# Altium PCB PCB1.PcbDoc
Units mil, origin at the board's own origin, x right, y up, seen from the top; angles counter-clockwise.
Board outline 6000 x 4000 mil, 2 copper layers (Top Layer, Bottom Layer); 81 components, 79 nets, 280 pads, 19 vias.
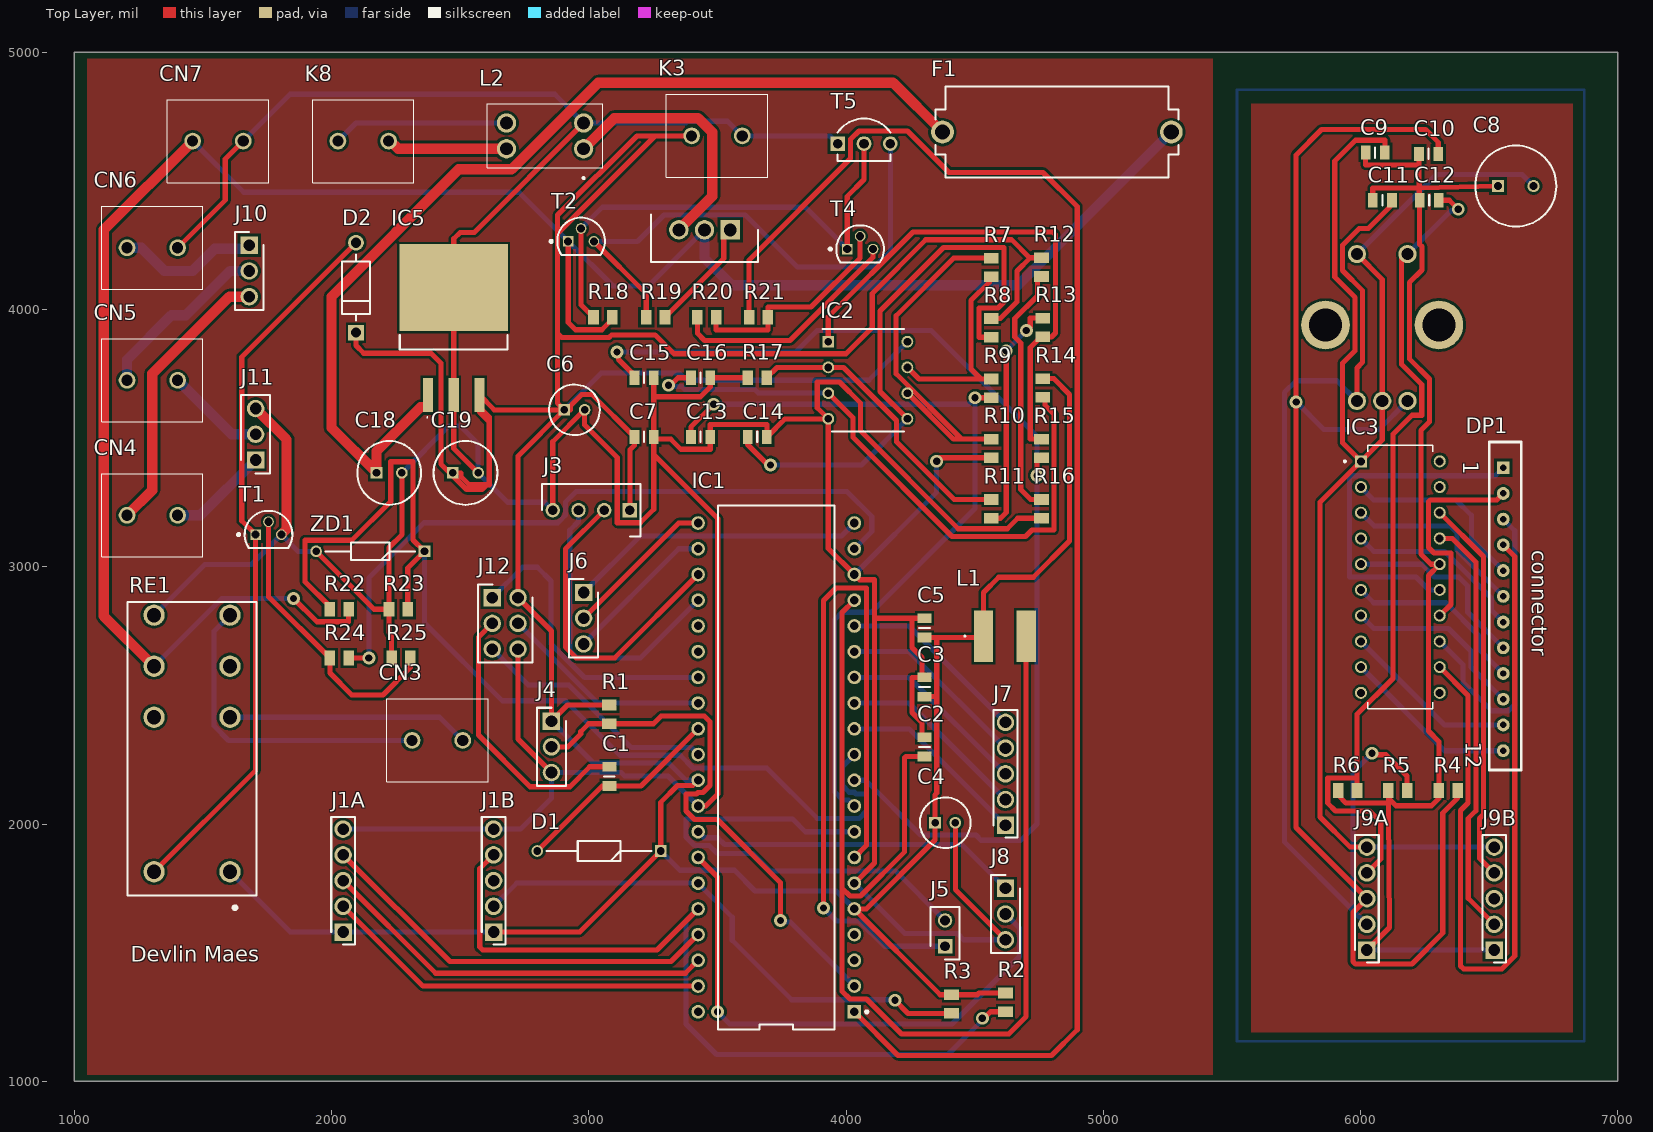
[diagram p0: Top Layer view]
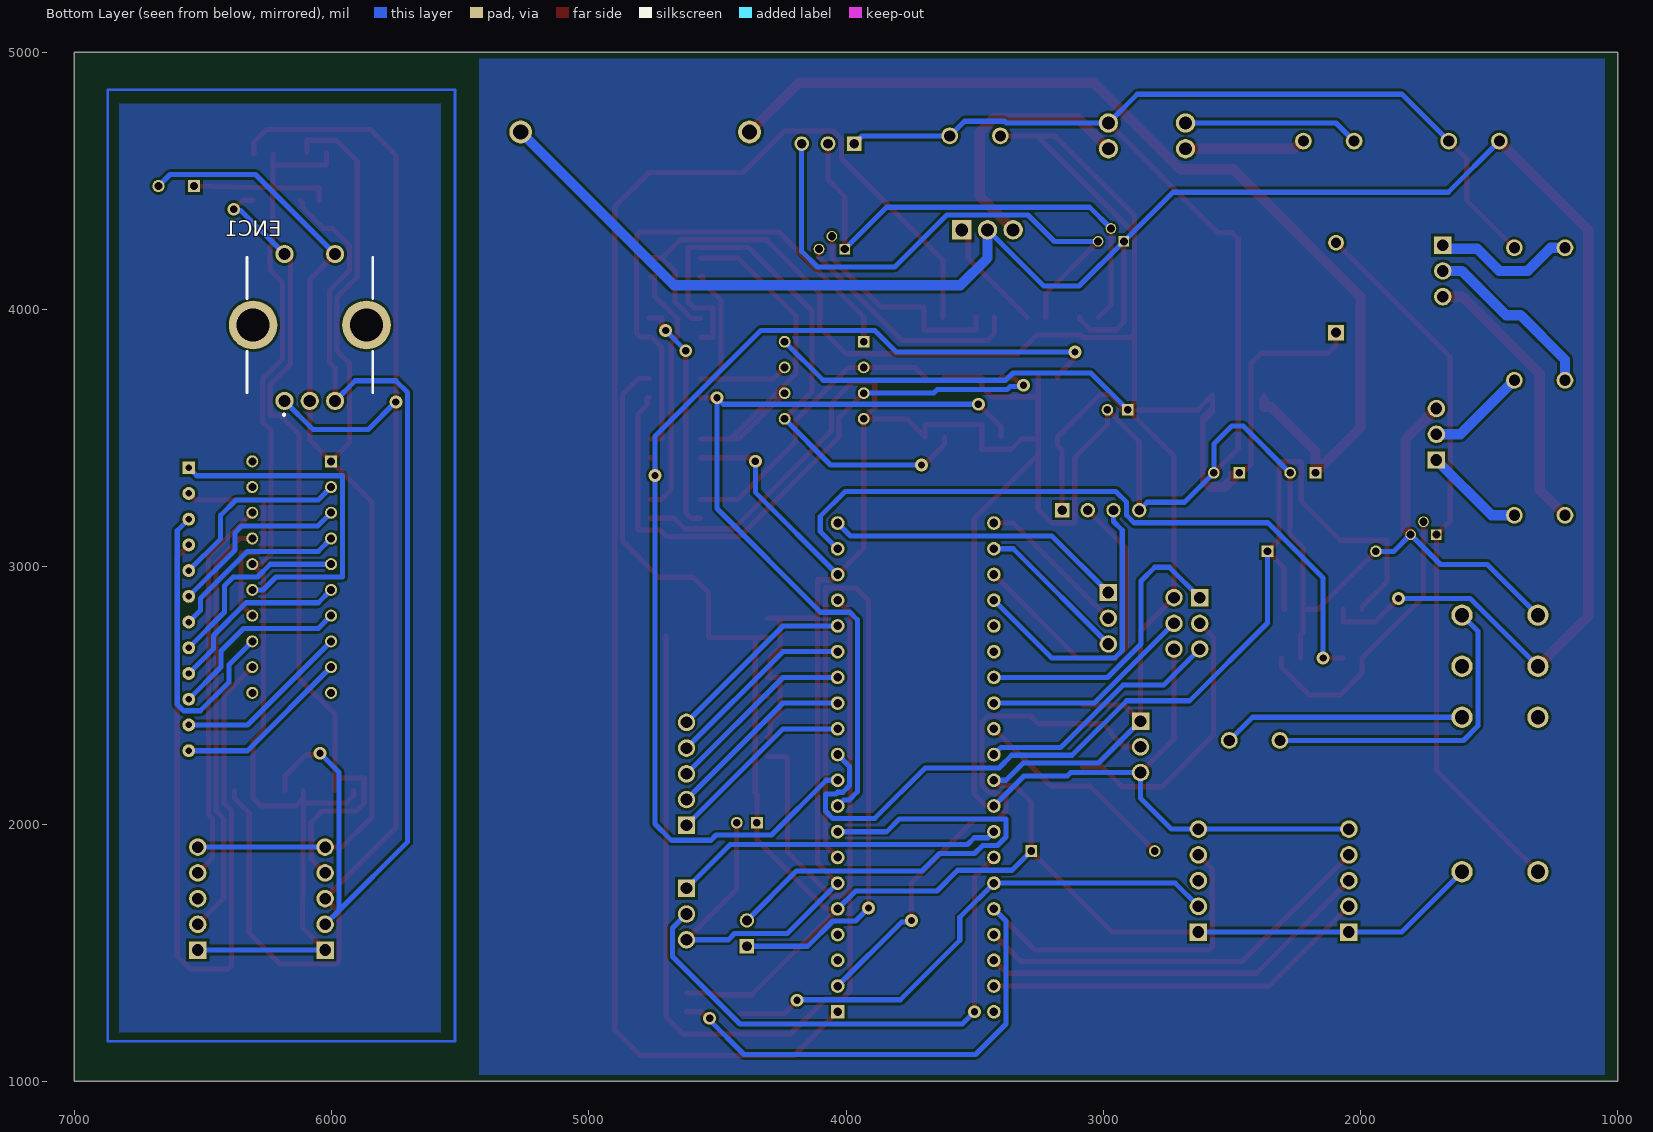
[diagram p1: Bottom Layer view, seen from below]
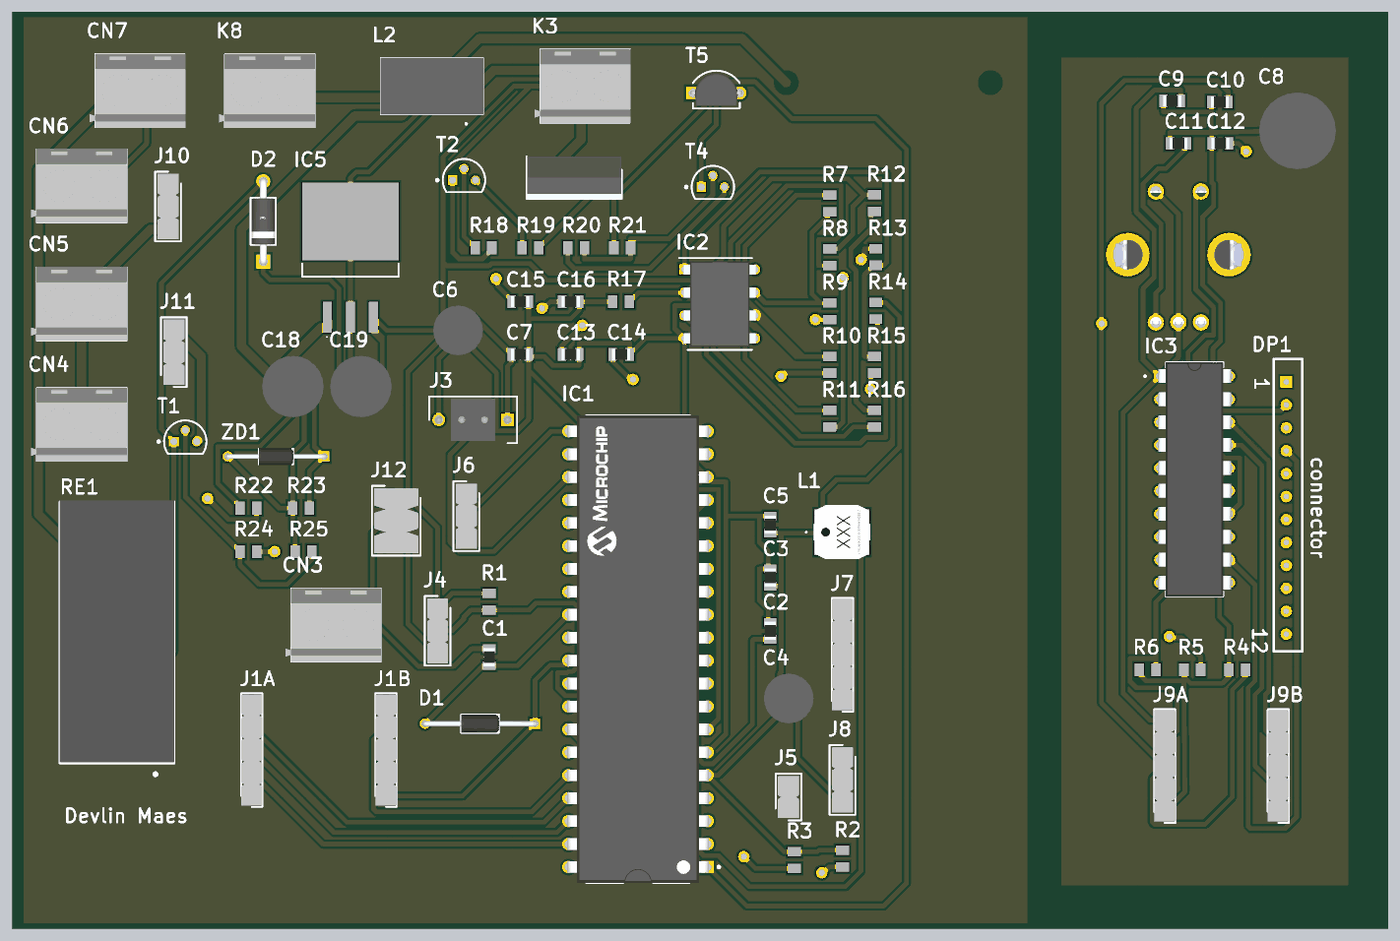
[diagram p2: 3D render of the assembled board from above, using the file's embedded part models]

## Layer stack, top to bottom
Top Solder: solder mask 0.4, Solder Resist, Dk 3.5
Top Layer: signal copper 1.4
Dielectric 1: dielectric 12.6, FR-4, Dk 4.8
Bottom Layer: signal copper 1.4
Bottom Solder: solder mask 0.4, Solder Resist, Dk 3.5

## Board outline
1000,1000 7000,1000 7000,5000 1000,5000
board region "Default Layer Stack Region": 5475,5000 7000,5000 7000,1000 5475,1000
board region "Default Layer Stack Region": 5475,1000 1000,1000 1000,5000 5475,5000

## Design rules (kind name [scope] priority, off if disabled: settings)
Clearance [All] p1: gap=10 ignorepadtopadclearanceinfootprint=FALSE
Height [All] p1: minheight=0 maxheight=2000 prefheight=500
PolygonConnect [All] p1: connectstyle=Relief reliefconductorwidth=10 reliefentries=4 polygonreliefangle="90 Angle" airgapwidth=10
RoutingVias [All] p1: holewidth=28 width=50 viastyle="Through Hole" minholewidth=28 minwidth=50 maxholewidth=28 maxwidth=50
SolderMaskExpansion [All] p1: expansion=4 istentingtop=FALSE
Width [All] p1: maxlimit=50 minlimit=20 preferedwidth=20 minimp=50.000000 maximp=50.000000 favimp=50.000000
29 further rules are at their usual default settings.

## Classes and differential pairs
component class Voeding: C18 C19 CN3 CN4 CN5 CN6 CN7 D2 F1 IC5 J10 J11 K1 K2 R22 R23 R24 R25 RE1 T1 ZD1
component class Versterker: C6 C7 C13 C14 C15 C16 IC2 K3 R7 R8 R9 R10 R11 R12 R13 R14 R15 R16 R17
component class Regelaar: K8 L2 R18 R19 R20 R21 T2 T4 T5
component class display: C8 C9 C10 C11 C12 DP1 ENC1 IC3 J9A J9B R4 R5 R6
component class CPU: C1 C2 C3 C4 C5 D1 IC1 J1A J1B J3 J4 J5 J6 J7 J8 J12 L1 R1 R2 R3

## Components (designator, comment, footprint, x,y, rotation, side; value= is the part's Value field where it differs from the comment)
C1 "10 nF" 0805 3080,2185 r90 top
C2 "10 nF" 0805 4305,2300 r90 top
C3 "100n" 0805 4305,2532.4 r90 top
C4 "10µ 50V" "Elco 10uF 50V" 4346.26,2005 r0 top
C5 "100 n" 0805 4305,2762.6 r90 top
C6 "10µF 50V" "Elco 10uF 50V" 2905,3610 r0 top
C7 "10 nF" 0805 3215,3505 r0 top
C8 "100µ 50V" "Elco 100uF 50V" 6535,4480 r0 top
C9 "100 nF" 0805 6057.4,4610 r0 top
C10 "10 nF" 0805 6265,4605 r0 top
C11 "10 nF" 0805 6085,4425 r0 top
C12 "10 nF" 0805 6267.4,4425 r0 top
C13 "10 nF" 0805 3435,3505 r0 top
C14 "10 nF" 0805 3655,3505 r0 top
C15 "10 nF" 0805 3215,3735 r0 top
C16 "10 nF" 0805 3435,3735 r0 top
C18 "100µF 25V" "Elco 100uF 25V" 2175,3365 r0 top
C19 "100µF 25V" "Elco 100uF 25V" 2471.57,3365 r0 top
CN3 "282836-2" "Schroefconnector 2 Pin - duplicate" 2510,2325 r0 top
CN4 "lader" "Schroefconnector 2 Pin - duplicate" 1401.85,3200 r0 top
CN5 "Batterij 20V 2Ah-4Ah" "Schroefconnector 2 Pin - duplicate" 1401.85,3725 r0 top
CN6 "282836-2" "Schroefconnector 2 Pin - duplicate" 1401.85,4240 r0 top
CN7 "282836-2" "Schroefconnector 2 Pin - duplicate" 1656.85,4655 r0 top
D1 "1N4148-B" 1N4148 3280,1895 r180 top
D2 "1N4007 diode" 1N4007(diode) 2095,4085 r90 top value=15pF
DP1 "7segment" DIP12(7segment) 6620,2975 r270 top
ENC1 "PEC11R-4225F-S0024" Encoder 6084.53,3940 r180 bottom
F1 "" FuseHolder -45180.12,-45310 r180 top
IC1 "ATMEGA4809-PF" "ATMEGA4809-PF(integraded circuit)" 3728.75,2220 r180 top
IC2 "MCP6002-I/P" Opamp 4085,3725 r0 top
IC3 "TM1637" TM1637 6155,2960 r0 top
IC5 "TL780-05CKTTR" "DC-DC Convertor" 2475,3933.23 r0 top
J1A "5-146280-5" "5 Pin Header" 2045,1580 r90 top
J1B "5-146280-5" "5 Pin Header" 2630,1580 r90 top
J3 "5-146280-4" "4 Pin Header" 3160,3220 r90 top
J4 "5-146280-3" "3 Pin Header" 2855,2400 r270 top
J5 "5-146280-2" "2 Pin Header" 4385,1525 r90 top
J6 "5-146280-3" "3 Pin Header" 2980,2900 r270 top
J7 "5-146280-5" "5 Pin Header" 4620,1995 r90 top
J8 "5-146280-3" "3 Pin Header" 4620,1750 r270 top
J9A "5-146280-5" "5 Pin Header" 6025,1510 r90 top
J9B "5-146280-5" "5 Pin Header" 6520,1510 r90 top
J10 "5-146280-3" "3 Pin Header" 1680,4250 r270 top
J11 "5-146280-3" "3 Pin Header" 1705,3415 r90 top
J12 "2x3 Pin Header" "2x3 Pin Header" 2625,2880 r270 top
K3 "282836-2" "Schroefconnector 2 Pin - duplicate" 3596.85,4675 r0 top
K8 "282836-2" "Schroefconnector 2 Pin - duplicate" 2221.85,4655 r0 top
L1 "10uH" Smoorspoel 4617.68,2730 r0 top
L2 "Smoorspoel commom mode" "Common mode smoorspoel" 2980,4625 r90 top
R1 "4k7" weerstand 3080,2426.42 r90 top
R2 "4k7" weerstand 4620,1306.42 r90 top
R3 "4k7" weerstand 4410,1300 r90 top
R4 "10k" weerstand 6341.42,2130 r180 top
R5 "10k" weerstand 6145,2130 r180 top
R6 "10k" weerstand 5950,2130 r180 top
R7 "18k" weerstand 4565,4163.58 r90 top
R8 "5k6" weerstand 4565,3928.58 r90 top
R9 "5k6" weerstand 4565,3693.58 r90 top
R10 "100E" weerstand 4565,3460 r90 top
R11 "18k" weerstand 4565,3225 r90 top
R12 "1M" weerstand 4760,4165 r90 top
R13 "18k" weerstand 4765,3930 r90 top
R14 "5k6" weerstand 4765,3695 r90 top
R15 "5k6" weerstand 4760,3460 r90 top
R16 "10M" weerstand 4760,3225 r90 top
R17 "100E" weerstand 3655,3735 r0 top
R18 "4k7" weerstand 3055,3970 r0 top
R19 "100E" weerstand 3260,3970 r0 top
R20 "4k7" weerstand 3458.58,3970 r0 top
R21 "10k" weerstand 3660,3970 r0 top
R22 "6.8k" weerstand 2030,2835 r0 top
R23 "10k" weerstand 2260,2835 r0 top
R24 "10k" weerstand 2030,2645 r0 top
R25 "4.7k" weerstand 2270,2645 r0 top
RE1 "RT424005" "Relay RT424005" 1457.64,1814.21 r90 top
T1 "BC547C" "BC547C (transistor)" 1755,3125 r0 top
T2 "BC547C" "BC547C (transistor)" 2970,4265 r0 top
T3 "IRF9Z34NPBF" MOSFET 3550,4310 r180 top
T4 "BC547C" "BC547C (transistor)" 4055,4235 r0 top
T5 "BC557BTF" "transistor BC557" 4070,4660 r90 top
ZD1 "5V1" "Zener diode" 2361.26,3060 r180 top

## Footprints (in the part's own frame and the unit in brackets; to place one, negate y for a bottom-side part, rotate by r counter-clockwise, add the part's x,y. Pads: shape width x height; smd on the part's side, far side on the other; paste and mask are expansions set on the pad)
1N4007(diode) [mm]
  rect 1.55x1.55 hole 1 paste-2539.97 mask+0: 1(-4.44,0)
  round 1.55 hole 1 paste-2539.97 mask+0: 2(4.44,0)
  silkscreen extent -3.27,-1.4 3.27,1.4, body extent -5.32,-1.5 5.32,1.5, height 0.25
1N4148 [mm] "DIOAD1220W56L420D200"
  rect 1.15x1.15 hole 0.75: 1(0,0)
  round 1.15 hole 0.75: 2(12.2,0)
  silkscreen extent 0.92,-1 11.27,1, body extent -0.28,-1 12.48,1, height 1.99
"2 Pin Header" [mm]
  rect 1.425x1.425 hole 0.95: 1(0,0)
  round 1.425 hole 0.95: 2(2.54,0)
  silkscreen extent -1.32,-1.42 3.86,1.42, body extent -1.07,-1.17 3.61,1.17, height 8.12
"2x3 Pin Header" [mm] "HDRV6W67P254_2X3_721X488X872P"
  rect 1.725x1.725 hole 1.15: 1(0,0)
  round 1.725 hole 1.15: 2(0,2.54) 3(2.54,0) 4(2.54,2.54) 5(5.08,0) 6(5.08,2.54)
  silkscreen extent -1.32,-1.42 6.4,3.96, body extent -1.07,-1.17 6.15,3.71, height 8.12
"3 Pin Header" [mm]
  rect 1.725x1.725 hole 1.15: 1(0,0)
  round 1.725 hole 1.15: 2(2.54,0) 3(5.08,0)
  silkscreen extent -1.32,-1.42 6.4,1.42, body extent -1.07,-1.17 6.15,1.17, height 8.12
"4 Pin Header" [mm]
  rect 1.425x1.425 hole 0.95: 1(0,0)
  round 1.425 hole 0.95: 2(0,2.54) 3(0,5.08) 4(0,7.62)
  silkscreen extent -2.59,-1.06 2.59,8.68, body extent -2.33,-0.38 2.33,8, height 8.21
"5 Pin Header" [mm]
  rect 1.725x1.725 hole 1.15: 1(0,0)
  round 1.725 hole 1.15: 2(2.54,0) 3(5.08,0) 4(7.62,0) 5(10.16,0)
  silkscreen extent -1.21,-1.17 11.37,1.17, body extent -1.07,-1.17 11.23,1.17, height 8.12
0805 [mm]
  rect 0.95x1.4 smd: 1(-0.95,0) 2(0.95,0)
  silkscreen extent 0,-0.53 0,0.53, body extent -1,-0.63 1,0.63, height 0.6
"ATMEGA4809-PF(integraded circuit)" [mm]
  rect 1.35x1.35 hole 0.85 paste-2539.97 mask+0: 1(-7.715,24.13)
  round 1.35 hole 0.85 paste-2539.97 mask+0: 2(-7.715,21.59) 3(-7.715,19.05) 4(-7.715,16.51) 5(-7.715,13.97) 6(-7.715,11.43) 7(-7.715,8.89) 8(-7.715,6.35) 9(-7.715,3.81) 10(-7.715,1.27) 11(-7.715,-1.27) 12(-7.715,-3.81) 13(-7.715,-6.35) 14(-7.715,-8.89) 15(-7.715,-11.43) 16(-7.715,-13.97) 17(-7.715,-16.51) 18(-7.715,-19.05) 19(-7.715,-21.59) 20(-7.715,-24.13) 21(7.715,-24.13) 22(7.715,-21.59) 23(7.715,-19.05) 24(7.715,-16.51) 25(7.715,-13.97) 26(7.715,-11.43) 27(7.715,-8.89) 28(7.715,-6.35) 29(7.715,-3.81) 30(7.715,-1.27) 31(7.715,1.27) 32(7.715,3.81) 33(7.715,6.35) 34(7.715,8.89) 35(7.715,11.43) 36(7.715,13.97) 37(7.715,16.51) 38(7.715,19.05) 39(7.715,21.59) 40(7.715,24.13)
  silkscreen extent -9.07,-25.88 5.76,25.88, body extent -8.49,-26.71 8.49,26.71, height 0.25
"BC547C (transistor)" [mm] "TO, 3-Leads, Body Dia 4.7mm, Pitch 1.27mm"
  rect 1.05x1.05 hole 0.8: 1(-1.27,0)
  round 1.05 hole 0.8: 2(0,1.27) 3(1.27,0)
  silkscreen extent -3.07,-1.34 2.35,2.35, body extent -2.35,-1.33 2.36,2.36, height 7.87
"Common mode smoorspoel" [mil] "CM2545X171B10"
  round 75 hole 50: 1(0,0) 2(100,0) 3(100,300) 4(0,300)
  silkscreen extent -118,-74 174,374, body extent -74,-74 174,374, height 378
"DC-DC Convertor" [mm]
  rect 1x3.4 smd: 1(-2.54,-6.745) 2(0,-6.745) 3(2.54,-6.745)
  rect 10.7x8.6 smd: 4(0,3.855)
  silkscreen extent -5.33,-9 5.33,-0.8
DIP12(7segment) [mil]
  rect 50x50 hole 25: 1(-410,-65)
  round 50 hole 25: 2(-310,-65) 3(-210,-65) 4(-110,-65) 5(-10,-65) 6(90,-65) 7(190,-65) 8(290,-65) 9(390,-65) 10(490,-65) 11(590,-65) 12(690,-65)
  silkscreen extent -510,-120 765,5
"Elco 10uF 50V" [mm] "CAPPRD200W55D500H1250"
  rect 1.15x1.15 hole 0.75: 1(0,0)
  round 1.15 hole 0.75: 2(2,0)
  silkscreen extent -1.5,-2.5 3.5,2.5, body extent -1.75,-2.75 3.75,2.75, height 12.5
"Elco 100uF 25V" [mm]
  rect 1.15x1.15 hole 0.75: 1(0,0)
  round 1.15 hole 0.75: 2(2.5,0)
  silkscreen extent -1.9,-3.15 4.4,3.15, body extent -2.15,-3.4 4.65,3.4, height 12.7
"Elco 100uF 50V" [mm]
  rect 1.2x1.2 hole 0.8: 1(0,0)
  round 1.2 hole 0.8: 2(3.5,0)
  silkscreen extent -2.25,-4 5.75,4, body extent -2.5,-4.25 6,4.25, height 12.5
Encoder [mm]
  round 1.8 hole 1.2: 1(-2.5,-7.5) 2(2.5,-7.5) 3(0,-7.5) 4(-2.5,7) 5(2.5,7)
  round 4.8 hole 3.28: 6(5.6,0) 7(-5.6,0)
  silkscreen extent -6.2,-8.95 6.2,6.7, body extent -7,-7.75 6.99,7.15, height 31.51
FuseHolder [mm] "FUSEHOLDER BLOCKS - PCB - CLIP COVER - THT"
  round 2.25 hole 1.5: 1(-1281.3,-1270) 2(-1258.7,-1270)
  silkscreen extent -1282,-1274.5 -1258,-1265.5, body extent -1282,-1274.5 -1258,-1265.5, height 13.55
MOSFET [mm]
  rect 1.92x1.92 hole 1.28: 1(0,0)
  round 1.92 hole 1.28: 2(2.54,0) 3(5.08,0)
  silkscreen extent -2.73,-1.49 7.81,3.2, body extent -2.67,-1.5 7.75,3.19, height 18.84
Opamp [mm]
  rect 1.159x1.159 hole 0.759: 1(-3.905,3.81)
  round 1.159 hole 0.759: 2(-3.905,1.27) 3(-3.905,-1.27) 4(-3.905,-3.81) 5(3.905,-3.81) 6(3.905,-1.27) 7(3.905,1.27) 8(3.905,3.81)
  silkscreen extent -4.48,-5.08 3.56,5.08, body extent -4.05,-4.75 4.05,4.75, height 5.33
"Relay RT424005" [mm]
  round 2.1 hole 1.4: 11(20.3,3.75) 12(20.3,-3.75) 14(15.26,-3.75) 21(25.34,3.75) 22(15.26,3.75) 24(25.34,-3.75) A1(0,-3.75) A2(0,3.75)
  silkscreen extent -3.67,-6.35 26.65,6.35, body extent -2.21,-6.35 26.79,6.35, height 15.86
"Schroefconnector 2 Pin - duplicate" [mm]
  round 1.65 hole 1.1: 1(0,0) 2(-5,0)
  silkscreen extent -7.5,-4.1 2.5,4.1, body extent -8.09,-4.1 2.51,4.1, height 10.02
Smoorspoel [mm] "10uH"
  rect 1.9x5.1 smd: 1(-2.1,0) 2(2.1,0)
  silkscreen extent -4,-0.05 -3.9,0.05, body extent -3.15,-3 3.15,3, height 4.5
TM1637 [mm]
  rect 1.19x1.19 hole 0.79: 1(-3.89,11.43)
  round 1.19 hole 0.79: 2(-3.89,8.89) 3(-3.89,6.35) 4(-3.89,3.81) 5(-3.89,1.27) 6(-3.89,-1.27) 7(-3.89,-3.81) 8(-3.89,-6.35) 9(-3.89,-8.89) 10(-3.89,-11.43) 11(3.89,-11.43) 12(3.89,-8.89) 13(3.89,-6.35) 14(3.89,-3.81) 15(3.89,-1.27) 16(3.89,1.27) 17(3.89,3.81) 18(3.89,6.35) 19(3.89,8.89) 20(3.89,11.43)
  silkscreen extent -5.58,-13 3.2,13, body extent -4.03,-13 4.03,13, height 4.31
"transistor BC557" [mm]
  rect 1.45x1.45 hole 0.95 paste-2539.97 mask+0: 1(-0.38,2.6)
  round 1.45 hole 0.95 paste-2539.97 mask+0: 2(-0.38,0) 3(-0.38,-2.6)
  silkscreen extent -2.09,-2.6 2.09,2.6, body extent -2.19,-3.42 2.19,3.42, height 0.25
weerstand [mm] "Chip Resistor, 2-Leads, Body 2.00x1.25mm, IPC Medium Density"
  rect 1.05x1.45 smd: 1(-0.925,0) 2(0.925,0)
  body extent -1.1,-0.72 1.1,0.72, height 0.5
"Zener diode" [mm] "DIOAD1068W53L380D172"
  rect 1.15x1.15 hole 0.75: 1(0,0)
  round 1.15 hole 0.75: 2(10.7,0)
  silkscreen extent 0.93,-0.86 9.77,0.86, body extent -0.26,-0.95 10.95,0.95, height 1.9

## Part data
C1 C2 C3 C5 C7 C9 C10 C11 C12 C13 C14 C15 C16: library part "Condensator 0805", "Chip Multilayer Ceramic Capacitors for General Purpose, 0805, 10uF, X5R, 15%, 10%, 25V", Capacitance=10uF, Case Code (Imperial)=0805, Case Code (Metric)=2012, Dielectric=X5R, Max Operating Temperature=85°C, Min Operating Temperature=-55°C, Package Quantity=1, Tolerance=10%, Voltage=25V, Case/Package=0805, Depth=1.25mm, Height=1.25mm, Lead Free="Lead Free", Length=2mm, Material=Ceramic, Mount="Surface Mount", Packaging="Tape and Reel", Radiation Hardening=No, Termination=SMD/SMT, Thickness=0.053inch, Voltage Rating=25V, Voltage Rating (DC)=25V, Width=0.049inch
C4 C6 C18 C19: library part "Condensator Elco", Manufacturer="AVX Interconnect / Elco", Part Number=02015A270JAT2A
C8: library part "Condensator Elco", "100µ / 50V", Manufacturer="AVX Interconnect / Elco", Part Number=02015A270JAT2A
CN3 CN6 CN7: library part "Schroefconnector 2 Pin L", "Connector", Manufacturer_Name="TE Connectivity", Datasheet Link=https://www.te.com/commerce/DocumentDelivery/DDEController?Action=showdoc&DocId=Customer+Drawing%7F282836%7FJ%7Fpdf%7FEnglish%7FENG_CD_282836_J.pdf%7F282836-2, Height=10mm, Manufacturer_Part_Number=282836-2
CN4 CN5: library part "Schroefconnector 2 Pin L", "Connector", Manufacturer_Name="TE Connectivity", Manufacturer_Part_Number=282836-2, Datasheet Link=https://www.te.com/commerce/DocumentDelivery/DDEController?Action=showdoc&DocId=Customer+Drawing%7F282836%7FJ%7Fpdf%7FEnglish%7FENG_CD_282836_J.pdf%7F282836-2, Height=10mm
D1: "Diode", Manufacturer_Name=Rectron, Manufacturer_Part_Number=1N4148-B
D2: "Rectifier diode 1000 V 1 A DO-41, ,", Capacitance=15pF, Forward Current=1A, Manufacturer=Diotec, Manufacturer Part Number=1N4007, Max Junction Temp=+175°C, Max Repetitive Reverse Voltage=1000V, Max Surge Forward Current=27A, Peak Reverse Current=5uA, Temperature="-50°C to +175°C", Temperature Range Low=-50°C, Automotive=No, Category=Diode, ComponentLink2Description=Datasheet, ComponentLink2URL=https://datasheet.octopart.com/1N4007-Diotec-datasheet-62346875.pdf, Device Class L1="Discrete Semiconductors", Device Class L2=Diodes, Device Class L3="Rectifier Diodes", Height=2.8mm, Ipc Land Pattern Name=DIOAD888W100L520D280, Lead Free=Yes, Octopart=https://octopart.com/1n4007-diotec-4040411, Package=1N4007, Reverse Voltage=1000V, RoHS=TRUE, Temperature Range High=+175°C
ENC1: library part Encoder, "Undefined or Miscellaneous", Manufacturer_Name=Bourns, Mouser2 Part Number=652-PEC11R-4225F-S24, Datasheet Link=https://componentsearchengine.com//PEC11R-4225F-S0024.pdf, Manufacturer_Part_Number=PEC11R-4225F-S0024, Mouser2 Price/Stock=https://www.mouser.com/Search/Refine.aspx?Keyword=652-PEC11R-4225F-S24
F1: library part FuseHolder, Fuse Current=10A, Max Operating Temperature=120°C, Min Operating Temperature=-30°C, Voltage Rating (AC)=250V, Height=13.6mm, Mount="Through Hole", NexarPartId=56808803, Packaging=Box, REACH SVHC=Unknown, RoHS=Non-Compliant
IC1: "Integrated Circuit", Manufacturer_Name=Microchip, Mouser2 Part Number=556-ATMEGA4809-PF, Datasheet Link=https://componentsearchengine.com//ATMEGA4809-PF.pdf, Height=6.35mm, Manufacturer_Part_Number=ATMEGA4809-PF, Mouser2 Price/Stock=https://www.mouser.com/Search/Refine.aspx?Keyword=556-ATMEGA4809-PF
IC2: library part Opamp, "AMP-OPA-MCP6002-IL8", Case/Package=PDIP, Input Bias Current=1pA, Input Offset Voltage (Vos)=4.5mV, Max Frequency=1kHz, Max Input Voltage=6V, Max Operating Temperature=85°C, Min Input Voltage=1.8V, Min Operating Temperature=-40°C, Nominal Supply Current=100uA, Operating Supply Voltage=5.5V, Output Current=23mA, Package Quantity=60, Power Supply Rejection Ratio (PSRR)=86dB, Voltage Gain=112dB, Amplifier Type="GENERAL PURPOSE", Bandwidth=1MHz, Common Mode Rejection Ratio=60dB, Gain Bandwidth Product=1MHz, Height=0.195inch, Input Offset Voltage-Max=4.5mV, Lead Free="Lead Free", Length=0.4inch, Max Supply Voltage=6V, Min Supply Voltage=1.8V, Mount="Through Hole", Number of Amplifiers=2, Number of Channels=2, Number of Circuits=2, Number of Elements=2, Number of Pins=8, Operating Supply Current=100uA, Output Current per Channel=23mA, Packaging=Rail/Tube, Radiation Hardening=No, REACH SVHC="No SVHC", RoHS Compliant=Yes, Slew Rate=0.6V/µs, Slew Rate-Nom=0.6V/µs, Supply Current=100uA, Technology=CMOS, Unity Gain Bandwidth Product=1MHz, Width=0.28inch
IC3: "LED Drive Control Special Circuit", Package=Package, Availability="Not in stock", Check_prices=https://www.snapeda.com/parts/TM1637/Titan+Micro+Electronics/view-part/?ref=eda, MF="Titan Micro Electronics", MP=TM1637, Price=None, SnapEDA_Link=https://www.snapeda.com/parts/TM1637/Titan+Micro+Electronics/view-part/?ref=snap
IC5: library part "DC/DC Convertor", "IC REG LIN 5V 1.5A DDPAK/TO263-3", Case/Package=TO-263, Dropout Voltage=2V, Max Input Voltage=25V, Max Operating Temperature=125°C, Max Output Current=1.5A, Max Output Voltage=5V, Min Input Voltage=7V, Min Operating Temperature=0°C, Output Voltage Accuracy=1%, Package Quantity=1, Power Supply Rejection Ratio (PSRR)=85dB, Quiescent Current=8mA, Accuracy=1%, Height=4.83mm, Lead Free="Lead Free", Length=10.67mm, Mount="Surface Mount", Nominal Output Voltage=5V, Number of Outputs=1, Number of Pins=3, Number of Regulators=1, Output Current=1.5A, Output Type=Fixed, Output Voltage=5V, Packaging="Tape and Reel", Polarity=Positive, REACH SVHC="No SVHC", Weight=0.050897oz, Width=9.65mm
J1A J1B J7 J9A J9B: library part "5 Pin Header", "Connector 5-146280-5", Manufacturer_Name="TE Connectivity", Mouser2 Part Number=571-5-146280-5, Datasheet Link=https://componentsearchengine.com//5-146280-5.pdf, Height=8.21mm, Manufacturer_Part_Number=5-146280-5, Mouser2 Price/Stock=https://www.mouser.com/Search/Refine.aspx?Keyword=571-5-146280-5
J3: library part "4 Pin Header L", "Connector 5-146280-4", Manufacturer_Name="TE Connectivity", Datasheet Link=https://datasheet.datasheetarchive.com/originals/distributors/DKDS-20/396066.pdf, Height=8.21mm, Manufacturer_Part_Number=5-146280-4
J4 J6: library part "3 Pin Header L", "Connector 5-146280-3", Manufacturer_Name="TE Connectivity", Mouser2 Part Number=571-5-146280-3, Datasheet Link=https://componentsearchengine.com//5-146280-3.pdf, Height=8.21mm, Manufacturer_Part_Number=5-146280-3, Mouser2 Price/Stock=https://www.mouser.com/Search/Refine.aspx?Keyword=571-5-146280-3
J5: library part "2 Pin Header L", "Connector", Manufacturer_Name="TE Connectivity", Datasheet Link=http://www.te.com/commerce/DocumentDelivery/DDEController?Action=showdoc&DocId=Customer+Drawing%7F146280%7FH2%7Fpdf%7FEnglish%7FENG_CD_146280_H2.pdf%7F5-146280-2, Height=8.72mm, Manufacturer_Part_Number=5-146280-2
J8 J10 J11: library part "3 Pin Header R", "Connector 5-146280-3", Manufacturer_Name="TE Connectivity", Mouser2 Part Number=571-5-146280-3, Datasheet Link=https://componentsearchengine.com//5-146280-3.pdf, Height=8.21mm, Manufacturer_Part_Number=5-146280-3, Mouser2 Price/Stock=https://www.mouser.com/Search/Refine.aspx?Keyword=571-5-146280-3
J12: "Connector", Manufacturer_Name="TE Connectivity", Manufacturer_Part_Number=5-146256-3, Datasheet Link=https://www.te.com/commerce/DocumentDelivery/DDEController?Action=srchrtrv&DocNm=146256&DocType=Customer+Drawing&DocLang=English, Height=8.72mm
K3 K8: library part "Schroefconnector 2 Pin R", "Connector", Manufacturer_Name="TE Connectivity", Datasheet Link=https://www.te.com/commerce/DocumentDelivery/DDEController?Action=showdoc&DocId=Customer+Drawing%7F282836%7FJ%7Fpdf%7FEnglish%7FENG_CD_282836_J.pdf%7F282836-2, Height=10mm, Manufacturer_Part_Number=282836-2
L1: library part Smoorspoel, "Inductor VLS6045EX-100M-H", Manufacturer_Name=TDK, Manufacturer_Part_Number=VLS6045EX-100M-H, Mouser2 Part Number=810-VLS6045EX-100M-H, Datasheet Link=https://componentsearchengine.com//VLS6045EX-100M-H.pdf, Mouser2 Price/Stock=https://www.mouser.com/Search/Refine.aspx?Keyword=810-VLS6045EX-100M-H
L2: "Transformer CM2545X171B-10", Manufacturer_Name="Laird Technologies", Manufacturer_Part_Number=CM2545X171B-10, Datasheet Link=https://datasheet.datasheetarchive.com/originals/dk/DKDS-7/122753.pdf, Height=9.5mm
R1 R2 R3 R4 R5 R6 R7 R8 R9 R10 R11 R12 R13 R14 R15 R16 R17 R18 R19 R20 R21 R22 R23 R24 R25: library part weerstand, Manufacturer="Vishay Dale", Part Number=CRCW08050000Z0EA
RE1: library part Relay, "RELAY GENERAL PURPOSE DPDT 8A 5V", Ambient Temperature Range High=+85°C, Ambient Temperature Range Low=-40°C, Coil Power=403mW, Coil Resistance=62Ω, Coil Voltage=5V, Current Rating=8A, Manufacturer="TE Connectivity", Automotive=No, Category=Relay, Coil Type=Non-Latching, ComponentLink2Description=Datasheet, ComponentLink2URL=https://www.te.com/commerce/DocumentDelivery/DDEController?Action=showdoc&DocId=Data+Sheet%7FRT2%7F1014%7Fpdf%7FEnglish%7FENG_DS_RT2_1014.pdf%7F5-1393243-9, Device Class L1=Electromechanical, Device Class L2=Relays, Device Class L3="Power Relays", Digikey Description="RELAY GENERAL PURPOSE DPDT 8A 5V", Height=15.7mm, Lead Free=Yes, Manufacturer Part Number=RT424005, Mouser Description="General Purpose Relay, Rt2 Series, Power, Non Latching, Dpdt, 5 Vdc, 8 A Rohs Compliant: Yes", Number Of Contacts=2, Octopart=https://octopart.com/5-1393243-9-te+connectivity-41835766, Package=RT424005, RoHS=TRUE, Throw Configuration=DPDT
T1 T2 T4: "Amplifier Transistor, NPN Silicon, 3-Pin, 0,1A TO-92, Bulk Box", Manufacturer="On Semiconductor", ComponentLink1Description="Manufacturer URL", ComponentLink1URL=http://www.onsemi.com/, ComponentLink2Description=Datasheet, ComponentLink2URL=http://www.onsemi.com/pub_link/Collateral/BC546-D.PDF, ComponentLink3Description="Package Specification", ComponentLink3URL=http://www.onsemi.cn/pub_link/Collateral/2N6426-D.PDF, DatasheetVersion="Rev. 7", fT Min (MHz)=150, IC Continuous (A)=0.1, Mounting Technology="Through Hole", PackageDescription="3-Pin Transistor Outline, Body 4.825 x 3.685 mm, Pitch 1.27 mm", PackageReference=TO-92-3-29-11_AM_SL, PackageVersion="Rev. AM", Packing="Bulk Box", PartNumber=BC547C, Polarity=NPN, RoHS=FALSE
T3: library part MOSFET, "MOSFET (P-Channel)", Manufacturer_Name=Infineon, Mouser2 Part Number=942-IRF9Z34NPBF, Datasheet Link=https://componentsearchengine.com//IRF9Z34NPBF.pdf, Height=4.69mm, Manufacturer_Part_Number=IRF9Z34NPBF, Mouser2 Price/Stock=https://www.mouser.com/Search/Refine.aspx?Keyword=942-IRF9Z34NPBF
T5: library part BC557, "BC557BTF Small Signal Bipolar Transistor, 0.1A I(C), 45V V(BR)CEO, 1-Element, PNP, Silicon, TO-92", Case/Package=TO-92, Collector Base Voltage (VCBO)=-50V, Collector Emitter Breakdown Voltage=45V, Collector Emitter Saturation Voltage=-250mV, Current Rating=-100mA, Emitter Base Voltage (VEBO)=-5V, Frequency=150MHz, Manufacturer Lifecycle Status=ACTIVE, Max Collector Current=100mA, Max Frequency=10MHz, Max Operating Temperature=150°C, Max Power Dissipation=500mW, Min Operating Temperature=-65°C, Voltage Rating (DC)=-45V, Collector Emitter Voltage (VCEO)=45V, Contact Plating=Tin, Element Configuration=Single, Gain Bandwidth Product=150MHz, Height=5.33mm, hFE Min=110, Lead Free="Lead Free", Length=5.2mm, Lifecycle Status=Production, Max Breakdown Voltage=45V, Mount="Through Hole", NexarPartId=84408945, Number of Elements=1, Number of Pins=3, Polarity=PNP, Power Dissipation=500mW, REACH SVHC="No SVHC", RoHS=Compliant, Schedule B="8541210080, 8541210080|8541210080|8541210080|8541210080|8541210080", Transition Frequency=150MHz, Weight=240mg, Width=4.19mm
ZD1: library part Zenerdiode, "Zener Diode", Manufacturer_Name="ON Semiconductor", Manufacturer_Part_Number=1N5231CTR, Mouser2 Part Number=512-1N5231CTR, Datasheet Link=https://componentsearchengine.com//1N5231CTR.pdf, Mouser2 Price/Stock=https://www.mouser.com/Search/Refine.aspx?Keyword=512-1N5231CTR

## Via types
v1: diameter 50, hole 28, Top Layer to Bottom Layer, 19 vias

## Nets (pads, with @x,y where several pads share a name; then routed paths per layer and width w, separated by ;. In a path a pad name is that pad's centre, name@x,y a point inside that pad or via, vN(x,y) a via of type N, cw(c..) or ccw(c..) an arc to the next point about the centre after c; other vN are vias at no path point)
+5: C3.1 C4.1 C5.1 C6.1 C7.1 C19.1 D1.1 D2.1 IC1.5 IC1.31 IC2.8 IC5.3 J1A.1 J1B.1 J3.1 J4.1 J12.2 K3.2 L1.1 R1.2 R2.2 R3.2 R8.2 R12.2 R14.2 RE1.A1 | length 17504.1
  Top Layer w20: D2.1 2095,3860 2125,3830 2387,3830 2425,3792 2425,3400 2525,3300 2585,3300 2604,3319 ; C19.1 2504,3365 2504,3350 2535,3319 2604,3319 ; J1B.1 2965,1580 D1.1 3280,2084.22 3345.39,2149.61 3404.61,2149.61 IC1.31 ; R1.2 2917.84,2462.84 J4.1 2855,2750 J12.2 2725,3430 C6.1 ; J3.1 3160,3454.72 3177.6,3472.32 C7.1 3013.6,3669 2972,3669 2928,3625 2928,3610 C6.1 ; K3.2 3258,4675 ; C3.1 4353,2495 ; C5.1 4353,2725.2 ; R8.2 4600,3965 4665,4030 4665,4150 4716.42,4201.42 ; R2.2 4517.42,1342.83 4511,1336.42 R3.2 4366.08,1336.42 IC1.5 4079,1670 4346.26,1937.26 C4.1 4346.26,2113.26 4353,2120 4353,2495 ; R12.2 4716.42,4201.42 ; R14.2 4807.58,3731.42 4869,3670 4869,3100 4728,2959 4594,2959 4535,2900 L1.1 4535,2725.2 4353,2725.2 ; IC5.3@2575,3620 IC5.3 2632.68,3610 C6.1 ; IC5.3@2575,3620 2575,3601 2613,3563 ; IC5.3@2575,3620 2613,3582 2613,3563 ; 2604,3319 2613,3319 2613,3328 ; 2604,3319 2613,3328 ; 2613,3328 2613,3563 ; 2879,3906.72 2879,4296 ; 2879,3906.72 2879,3636 C6.1 ; 2879,3906.72 2894.26,3891.46 3079.14,3891.46 3089.25,3901.57 3257.43,3901.57 3331,3828 4000,3828 4102,3930 4102,4062.78 4310.22,4271 4644,4271 4713.58,4201.42 4716.42,4201.42 ; 2879,4296 2879,4367 3187,4675 3258,4675 ; 2879,4296 3258,4675 ; 4353,2495 4353,2725.2
  Bottom Layer w20: RE1.A1 1839.49,1580 J1A.1 J1B.1 ; J4.1 3018,2237 3311,2237 3378,2170 IC1.31 ; C6.1 3048.79,3753.79 3351.1,3753.79 3379.9,3725 4088.74,3725 IC2.8 ; D1.1 3355,1820 3566,1820 3646,1740 3962.5,1740 IC1.5
GND: C2.2 C3.2 C4.2 C5.2 C6.2 C7.2 C13.2 C14.2 C15.2 C16.2 C18.2 C19.2 CN6.1 CN7.1 IC1.6 IC1.18 IC1.32 IC2.4 IC5.2 IC5.4 J1A.5 J1B.5 J3.4 J4.3 J8.3 J11.3 J12.6 K3.1 L2.2 R10.1 R16.1 R17.1 R23.1 R25.1 RE1.21 T1.3 T5.1 ZD1.2 | length 20529.8
  Top Layer w20: CN6.1 1587,4425.15 1587,4585.15 CN7.1 ; ZD1.2 2165,2835 R23.1 ; R25.1 2233.58,2735 2223.58,2745 R23.1 ; C18.2 2273.43,3124.84 2223.58,3075 R23.1 ; C19.2 2475,3460 IC5.2 IC5.4 2475,4275 2500,4300 2555,4300 L2.2 ; J12.6 2725,2330 J4.3 ; J3.4 2860,3486.26 C6.2 2983.74,3552.26 3111,3425 3111,3171 3200,3171 3252.4,3223.4 3252.4,3436.6 ; C15.2 3252.4,3661.87 ; IC1.32 3455,2070 3501.58,2116.58 3501.58,3187.42 3252.4,3436.6 ; R17.1 C16.2 3472.4,3698.4 3434.9,3660.9 3253.36,3660.9 3252.4,3661.87 ; IC1.6 4111,1848.5 4111,2800 ; C2.2 4296,2337.4 4296,2395 4257,2434 4257,2569.8 C3.2@4296,2569.8 ; C3.2 C3.2@4296,2569.8 ; C5.2 4257,2800 ; v1(4352.5,3410) 4366.08,3423.58 R10.1 ; C4.2 4425,1745 J8.3 ; R16.1 4667.58,3188.58 4626.91,3147.91 4436.43,3147.91 4057,3527.34 4057,3636 3975,3718 3888,3718 3888,3618.26 IC2.4 ; 3252.4,3436.6 C7.2@3252.4,3496 ; C7.2@3252.4,3496 3319,3496 3358,3457 3472.4,3457 C13.2 3472.4,3553 3692.4,3553 C14.2 3762.4,3575 IC2.4 ; C7.2@3252.4,3496 C7.2 3252.4,3661.87 ; IC2.4 3931.26,3071.24 IC1.18 4052.89,2949.61 4111,2949.61 4111,2800 ; 4111,2800 4257,2800 ; 4257,2800 4257,2686 4296,2647 C3.2@4296,2569.8
  Top Layer w40: J11.3 1825,3495 1825,3145.36 1805,3125.36 T1.3
  Bottom Layer w20: RE1.21 1507.15,3009 1689,3009 T1.3 1870,3060 ZD1.2 ; CN7.1 1838.85,4837 2868,4837 L2.2 3377,4725 3384,4732 3539.85,4732 K3.1 3937.68,4675 T5.1 ; J1A.5 J1B.5 2735,1980 2855,2100 J4.3 3126.67,2200 3140,2186.67 3308.33,2186.67 IC1.32 ; C18.2 2455.63,3547.21 2500,3547.21 2570,3477.21 C19.2 2683.96,3251.04 2828.96,3251.04 J3.4 ; IC1.6 4228.5,1574 4433,1574 4457,1550 J8.3 ; IC1.18 4352.5,3290 v1(4352.5,3410)
NetC1_1: C1.1 D1.2 IC1.29 | length 822.1
  Top Layer w20: D1.2 3052.28,2147.6 C1.1 3202.6,2147.6 IC1.29
NetC1_2: C1.2 J12.3 | length 1080.9
  Top Layer w20: J12.3 2571,2726 2571,2345.71 2771.71,2145 2926.6,2145 3004,2222.4 C1.2
NetC2_1: C2.1 IC1.17 L1.2 | length 4601.7
  Top Layer w20: IC1.17 3985,2822.5 3985,1750 ; C2.1 4233,2262.6 4228,2257.6 4228,1892 4056,1720 4015,1720 3985,1750 ; L1.2 4700.36,1251.36 4633,1184 4216,1184 4080,1320 4015,1320 3985,1350 3985,1750
NetC8_1: C8.1 C9.1 C10.1 C11.1 C12.1 IC3.16 J9A.1 J9B.1 R4.2 R5.2 R6.2 | length 5097.9
  Top Layer w20: R6.2 5913.58,2111.46 5944.04,2081 6108.58,2081 ; C9.1 6020,4562 6227.6,4562 ; J9A.1 6113,1598 6108.58,2052.42 6108.58,2081 ; C11.1 6047.6,4473 6228.75,4473 ; R5.2 6108.58,2100 ; C10.1 6227.6,4562 ; C8.1 6230,4473 ; 6108.58,2081 6108.58,2100 ; 6108.58,2100 6137.58,2071 6276,2071 6305,2100 R4.2 6305,2320 6264,2361 6264,2965.85 IC3.16 6274.72,3010 6234.72,3050 6234.72,3530.01 6268.39,3563.68 6268.39,3730.16 6190,3808.55 6190,4105 6239,4154 6239,4245 6230,4254 C12.1 ; 6227.6,4562 6227.6,4517.4 6228.75,4473 ; 6228.75,4473 C12.1 ; 6228.75,4473 6230,4473 ; C12.1 6230,4473
  Bottom Layer w20: J9A.1 J9B.1
NetC8_2: C8.2 C9.2 ENC1.3 ENC1.5 IC3.1 J9A.5 J9B.5 | length 5414
  Top Layer w20: ENC1.5 6084.53,4117.16 ENC1.3 6084.53,3492.68 IC3.1 ; J9A.5 5960.34,1910 5842.91,2027.43 5842.91,3251.06 IC3.1 ; C9.2 6094.8,4658 5981,4658 5900,4577 5900,4126 5978.55,4047.45 5978.55,3840 5930,3791.45 5930,3481.85 IC3.1
  Bottom Layer w20: ENC1.5 6295.51,4525 6627.8,4525 C8.2 ; J9A.5 J9B.5
NetC10_2: C10.2 ENC1.1 J9A.3 R4.1 | length 5437
  Top Layer w20: C10.2 6302.4,4650 6252.4,4700 5849,4700 5749,4600 5749,3641 v1(5750,3640) 5749,3639 5749,1986 J9A.3 5971,1656 5971,1465 5980,1456 6200,1456 6320,1576 6320,2043 6377.84,2100.84 R4.1
  Bottom Layer w20: v1(5750,3640) 5751,3640 5858,3533 6071.23,3533 ENC1.1
NetC11_2: C11.2 ENC1.2 J9A.2 R5.1 | length 4327.4
  Top Layer w20: ENC1.2 5986.1,3773.07 6008.55,3795.51 6008.55,4073 5930,4151.55 5930,4250 5995,4315 6030,4315 6113.7,4398.7 6113.7,4416.3 C11.2 ; v1(6045,2275) 6050.74,2269.26 6099.16,2269.26 6181.42,2187 R5.1
  Bottom Layer w20: ENC1.2 5907.83,3723 5750,3723 5704,3677 5704,1931 5971,1664 ; J9A.2 5971,1664 ; v1(6045,2275) 5971,2201 5971,1664
NetC12_2: C12.2 ENC1.4 J9A.4 R6.1 | length 3294.5
  Top Layer w20: R6.1 5986.42,2179 ; J9A.4 6079,1864 6079,2007 6035,2051 5902.91,2051 5872.91,2081 5872.91,2179 5986.42,2179 ; ENC1.4 6160,4215.59 6160,3787.39 6238.39,3709 6238.39,3589 6200,3589 6126,3515 6126,2566.16 5986.42,2426.58 5986.42,2179 ; C12.2 6345,4425 v1(6380,4390)
  Bottom Layer w20: ENC1.4 6351.62,4384.26 6374.26,4384.26 v1(6380,4390)
NetC13_1: C13.1 IC1.9 R9.1 | length 3177.8
  Top Layer w20: C13.1 3397.6,3544 v1(3485.6,3632) ; v1(4502,3657.16) R9.1
  Bottom Layer w20: v1(3485.6,3632) 4476.84,3632 v1(4502,3657.16) 4502,3226 4099,2823 3985,2823 3955.92,2793.92 3955.92,2125 3987.5,2093.42 4009.08,2093.42 IC1.9
NetC14_1: C14.1 IC2.5 R8.1 | length 2286.9
  Top Layer w20: C14.1 3617.6,3475 3696.6,3396 v1(3707,3396) ; IC2.5 4132,3681.74 4132,3993.8 4379.2,4241 4614,4241 4614,4029 4591,4006 4516.46,4006 4516.46,3892.16 R8.1
  Bottom Layer w20: v1(3707,3396) 4059.74,3396 IC2.5
NetC15_1: C15.1 IC1.10 R15.1 | length 4390.3
  Top Layer w20: v1(3110,3835) 3115.74,3829.26 3115.74,3805.72 3177.6,3743.86 C15.1 ; v1(4742,3355) 4742,3423.58 R15.1
  Bottom Layer w20: v1(3110,3835) 3805,3835 3888,3918 4331,3918 4742,3507 v1(4742,3355) 4742,2000 4679,1937 4525,1937 4505,1957 4289.58,1957 4076.58,2170 IC1.10
NetC16_1: C16.1 IC2.3 R14.1 | length 2435.7
  Top Layer w20: v1(3310,3705.9) 3318.12,3705.9 3347.21,3735 C16.1 ; IC2.3 4026.8,3579.46 4026.8,3503.29 4412.17,3117.91 4697.58,3117.91 4722.67,3143 4809,3143 4809,3593 4773,3629 4773,3658.58 R14.1
  Bottom Layer w20: v1(3310,3705.9) 3315.74,3700.16 3362.31,3700.16 3373.47,3689 3645,3689 3659,3675 IC2.3
NetC18_1: C18.1 F1.2 IC5.1 | length 3959.1
  Top Layer w20: IC5.1@2375,3650 IC5.1
  Top Layer w40: IC5.1@2375,3650 2375,3621.06 2374.69,3620.75 2345.75,3620.75 2175,3450 C18.1 2000,3540 2000,4050 2495,4545 2700,4545 3037,4882 4183,4882 F1.2
NetCN3_1: CN3.1 RE1.14 | length 942
  Bottom Layer w20: RE1.14 2420,2415 CN3.1
NetCN3_2: CN3.2 RE1.24 | length 1249.4
  Bottom Layer w20: RE1.24 1543,2749.57 1543,2382 1600,2325 CN3.2
NetCN4_1: CN4.1 J11.1 | length 392.2
  Bottom Layer w40: CN4.1 1490,3200 J11.1
NetCN4_2: CN4.2 J10.3 | length 1091.9
  Top Layer w40: CN4.2 1303,3298 1303,3750 1603,4050 J10.3
NetCN5_1: CN5.1 J11.2 | length 390.1
  Bottom Layer w40: CN5.1 1611.85,3515 J11.2
NetCN5_2: CN5.2 J10.2 | length 697.9
  Bottom Layer w40: CN5.2 1205,3805 1377.5,3977.5 1434.07,3977.5 1606.57,4150 J10.2
NetCN6_2: CN6.2 J10.1 | length 553.7
  Bottom Layer w40: CN6.2 1260,4240 1350,4150 1460,4150 1546.04,4236.04 1666.04,4236.04 J10.1
NetD2_2: D2.2 RE1.A2 T1.1 | length 2815.4
  Top Layer w20: RE1.A2 1705,2209.21 T1.1 1651.04,3178.96 1651.04,3815.85 D2.2
NetDP1_1: DP1.1 IC3.15 | length 1374.7
  Bottom Layer w20: IC3.15 6266,2910 6216,2960 5958,2960 5958,3354 6524,3354 DP1.1
NetDP1_2: DP1.2 IC3.14 | length 839.5
  Top Layer w20: IC3.14 6352,2853.85 6352,3053.43 6286,3053.43 6264.72,3074.7 6264.72,3253 6271.72,3260 6530,3260 DP1.2
NetDP1_3: DP1.3 IC3.13 | length 1192.6
  Bottom Layer w20: IC3.13 6399,2619.15 6399,2551 6510,2440 6575,2440 6600,2465 6600,3140 DP1.3
NetDP1_4: DP1.4 IC3.12 | length 3072.8
  Top Layer w20: IC3.12 6418.51,2499.64 6418.51,2081.46 6389,2051.95 6389,1448 6400,1437 6550,1437 6600,1487 6600,3040 DP1.4
NetDP1_5: DP1.5 IC3.2 | length 741.1
  Bottom Layer w20: IC3.2 6051.85,3260 6371,3260 6431,3200 6431,3109 DP1.5
NetDP1_6: DP1.6 IC3.3 | length 727.6
  Bottom Layer w20: IC3.3 6053.85,3158 6350,3158 6375.44,3132.56 6375.44,3064.56 DP1.6
NetDP1_7: DP1.7 IC3.4 | length 715.3
  Bottom Layer w20: IC3.4 6051.85,3060 6327,3060 6510,2877 6510,2830 DP1.7
NetDP1_8: DP1.8 IC3.5 | length 747.5
  Bottom Layer w20: IC3.5 6238,3010 6288,2960 6382,2960 6416,2926 6416,2824 DP1.8
NetDP1_9: DP1.9 IC3.6 | length 718.2
  Bottom Layer w20: IC3.6 6051.85,2860 6332,2860 6458.79,2733.21 6458.79,2681.21 DP1.9
NetDP1_10: DP1.10 IC3.7 | length 724.1
  Bottom Layer w20: IC3.7 6051.85,2760 6342,2760 6429.63,2672.37 6429.63,2610.37 DP1.10
NetDP1_11: DP1.11 IC3.8 | length 687.8
  Bottom Layer w20: IC3.8 6326.85,2385 DP1.11
NetDP1_12: DP1.12 IC3.9 | length 687.8
  Bottom Layer w20: IC3.9 6326.85,2285 DP1.12
NetIC1_1: IC1.1 R21.1 | length 6049.7
  Top Layer w20: R21.1 3623.58,4192.58 4018,4587 4018,4662 4050,4694 4239,4694 4400,4533 4766,4533 4899,4400 4899,1200 4799,1100 4202.5,1100 IC1.1
NetIC1_2: IC1.2 J4.2 R1.1 | length 2124.8
  Top Layer w20: J4.2 2919,2300 2969,2350 2969,2359 3000,2390 R1.1 3252,2390 3282,2420 3449,2420 3471.58,2397.42 3471.58,2150 3444.58,2123 3425,2123 3419,2117 3378,2117 3378,2050 3411,2017 3500,2017 3745,1772 v1(3745,1625)
  Bottom Layer w20: v1(3745,1625) 3750.74,1619.26 3783.24,1619.26 IC1.2
NetIC1_7: IC1.7 J5.1 | length 2981.6
  Top Layer w20: v1(3913,1673) 3913,2869 3961,2917 4079.08,2917 4079.08,1916.58 IC1.7
  Bottom Layer w20: v1(3913,1673) 3963,1623 4051,1623 4149,1525 J5.1
NetIC1_8: IC1.8 J5.2 | length 1886.8
  Bottom Layer w20: IC1.8 3842,1970 3792,2020 3378,2020 3378,1950 3411.42,1916.58 3468.42,1916.58 3500,1885 3636,1885 3704,1817 4193,1817 J5.2
NetIC1_11: IC1.11 R22.1 R23.2 ZD1.1 | length 4199.8
  Top Layer w20: R22.1 1993.58,2845.42 1897,2942 1897,3103 2079,3103 2230,3254 2230,3408 2317,3408 2317,3104.26 ZD1.1 2296.42,2995.16 R23.2
  Bottom Layer w20: ZD1.1 2361.26,2781.74 2664,2479 2909,2479 3121,2267 3356,2267 3405,2218 3692,2218 3888,2022 4052,2022 4080,2050 4080,2116.58 4039,2116.58 4032.15,2123.42 4012.5,2123.42 3985.92,2150 3985.92,2223.42 IC1.11
NetIC1_12: IC1.12 J7.1 | length 742.8
  Bottom Layer w20: IC1.12 4245,2370 J7.1
NetIC1_13: IC1.13 J7.2 | length 742.8
  Bottom Layer w20: IC1.13 4245,2470 J7.2
NetIC1_14: IC1.14 J7.3 | length 742.8
  Bottom Layer w20: IC1.14 4245,2570 J7.3
NetIC1_15: IC1.15 J7.4 | length 742.8
  Bottom Layer w20: IC1.15 4245,2670 J7.4
NetIC1_16: IC1.16 J7.5 | length 742.8
  Bottom Layer w20: IC1.16 4245,2770 J7.5
NetIC1_19: IC1.19 R24.2 | length 2707.4
  Top Layer w20: R24.2 v1(2145,2645)
  Bottom Layer w20: v1(2145,2645) 2145,2956 2360,3171 2880,3171 2909,3200 2909,3251 2950,3292 4004,3292 4100,3196 4100,3137.5 IC1.19
NetIC1_20: IC1.20 J6.1 | length 1164.3
  Bottom Layer w20: J6.1 3200,3120 3982.5,3120 IC1.20
NetIC1_21: IC1.21 J6.2 | length 598.3
  Top Layer w20: J6.2 3350,3170 IC1.21
NetIC1_22: IC1.22 J6.3 | length 598.3
  Bottom Layer w20: J6.3 3350,3070 IC1.22
NetIC1_23: IC1.23 J3.2 | length 1262.1
  Top Layer w20: J3.2 2909,3069 2909,2688 2951,2646 3101,2646 IC1.23
NetIC1_24: IC1.24 J3.3 | length 1162.9
  Bottom Layer w20: J3.3 2960,3175.95 2926,3141.95 2926,2675 2955,2646 3201,2646 IC1.24
NetIC1_27: IC1.27 J12.1 | length 1169.7
  Bottom Layer w20: J12.1 2743,2998 2800,2998 2853,2945 2853,2700 2983,2570 IC1.27
NetIC1_28: IC1.28 J12.4 | length 828.4
  Bottom Layer w20: J12.4 3035,2470 IC1.28
NetIC1_30: IC1.30 J12.5 | length 969.8
  Bottom Layer w20: J12.5 2765,2540 2922.57,2540 3165.57,2297 3398,2297 IC1.30
NetIC1_33: IC1.33 J8.1 | length 1286.1
  Bottom Layer w20: IC1.33 3448.42,1946.58 3501.58,1946.58 3528.15,1920 4450,1920 J8.1
NetIC1_34: IC1.34 J8.2 | length 2119.8
  Top Layer w20: IC1.34 3501,1794 v1(3501,1270)
  Bottom Layer w20: v1(3501,1270) 3548,1223 4412,1223 4674,1485 4674,1596 J8.2
NetIC1_35: IC1.35 J1B.2 R3.1 | length 2079.5
  Top Layer w20: v1(4190,1315) 4241.42,1263.58 R3.1
  Bottom Layer w20: J1B.2 2720,1770 IC1.35 3557.67,1637.33 3557.67,1547.75 3788.84,1316.57 4188.43,1316.57 v1(4190,1315)
NetIC1_36: IC1.36 J1B.4 R2.1 | length 3132
  Top Layer w20: J1B.4 2576,1826 2576,1521.72 2587.72,1510 3265,1510 IC1.36 ; v1(4530,1245) 4536.46,1245 4561.46,1270 R2.1
  Bottom Layer w20: IC1.36 3378,1623 3378,1223 3497,1104 4397,1104 4530,1237 v1(4530,1245)
NetIC1_37: IC1.37 J1A.4 | length 1595.4
  Top Layer w20: J1A.4 2460,1465 3320,1465 IC1.37
NetIC1_38: IC1.38 J1A.3 | length 1549.8
  Top Layer w20: J1A.3 2405,1420 3375,1420 IC1.38
NetIC1_39: IC1.39 J1A.2 | length 1508.4
  Top Layer w20: J1A.2 2355,1370 IC1.39
NetIC2_1: IC2.1 R13.1 R15.2 | length 2023.8
  Top Layer w20: IC2.1 3931.26,3972.26 4260,4301 4804,4301 4814,4291 4814,3909 4798.58,3893.58 R13.1 4757,3893.58 4716,3852.58 4716,3496.42 R15.2
NetIC2_2: IC2.2 R11.2 R17.2 | length 1151.5
  Top Layer w20: R17.2 3731.42,3775 IC2.2 3990,3775 4196,3569 4196,3486 4420.58,3261.42 R11.2
NetIC2_6: IC2.6 R7.2 R10.2 | length 1447.7
  Top Layer w20: IC2.6 4417.32,3496.42 4448.58,3496.42 ; R10.2 4448.58,3496.42 ; R7.2 4418.81,4200 4195,3976.19 4195,3750 4448.58,3496.42
NetIC2_7: IC2.7 R7.1 R9.2 | length 795.2
  Top Layer w20: IC2.7 4283.74,3730 4525,3730 ; R9.2 4525,3730 ; R7.1 4557,4127.16 4557,4106.21 4486.46,4035.67 4486.46,3768.54 4525,3730
NetIC3_17: IC3.17 J9B.2 | length 1640.9
  Top Layer w20: IC3.17 6357.07,3110 6448.51,3018.56 6448.51,2051.46 6419,2021.95 6419,1711 J9B.2
NetIC3_18: IC3.18 J9B.4 | length 1500.6
  Top Layer w20: IC3.18 6478.51,3039.64 6478.51,2036.96 6463,2021.46 6463,1867 J9B.4
NetK8_1: K8.1 L2.4 | length 470.6
  Top Layer w40: K8.1 2228.6,4655 2258.6,4625 L2.4
NetK8_2: K8.2 L2.3 | length 684
  Bottom Layer w20: K8.2 2095,4725 L2.3
NetL2_1: L2.1 T3.3 | length 1004.9
  Top Layer w40: L2.1 3099,4744 3425,4744 3480,4689 3480,4440 T3.3
NetR11_1: R11.1 R13.2 | length 910.5
  Top Layer w20: R11.1 4601,3188.58 4623,3210.58 v1(4623,3840) ; v1(4701,3918) 4716,3933 4716,3966.42 R13.2
  Bottom Layer w20: v1(4623,3840) v1(4701,3918)
NetR12_1: R12.1 R16.2 | length 987.3
  Top Layer w20: R16.2 4717.92,3261.42 4679.34,3300 4679.34,3869.66 4656,3893 4656,3965 4744,4053 4744,4128.58 R12.1
NetR18_1: R18.1 T2.2 T4.1 T5.2 | length 1938.8
  Top Layer w20: T2.2 2970,4018.58 R18.1 ; T4.1 4005,4440 4070,4505 T5.2
  Bottom Layer w20: T2.2 3052.8,4397.8 3842.2,4397.8 T4.1
NetR19_1: R19.1 T2.3 T5.3 | length 2102.4
  Top Layer w20: T2.3 3223.58,4061.42 R19.1
  Bottom Layer w20: T2.3 3189.2,4265 3292,4367.8 3608,4367.8 3810.8,4165 4111,4165 4172.36,4226.36 T5.3
NetR19_2: R19.2 T3.1 | length 459.7
  Top Layer w20: R19.2 3525,4198.58 3525,4310 T3.1
NetR20_1: R20.1 T4.3 | length 922.3
  Top Layer w20: R20.1 3422.16,3907.84 3450,3880 3782,3880 4105,4203 T4.3
NetR20_2: R20.2 R21.2 T4.2 | length 861.4
  Top Layer w20: R20.2 3495,3921 3696.42,3921 R21.2 3696.42,4009.42 3864.42,4009.42 4055,4200 T4.2
NetR24_1: R24.1 R25.2 T1.2 | length 1115.5
  Top Layer w20: T1.2 1755,2883.58 R24.1 1993.58,2587 2078.58,2502 2200,2502 2306.42,2608.42 R25.2
VIN: CN7.2 F1.1 R18.2 R22.2 RE1.11 T2.1 T3.2 | length 8270.4
  Top Layer w20: v1(1852,2877) 1943,2786 2066.42,2786 R22.2 ; T2.1 2920,3950 2948.54,3921.46 3050.87,3921.46 3091.42,3962 R18.2
  Top Layer w40: RE1.11 1115,2808.43 1115,4310 CN7.2
  Bottom Layer w20: RE1.11 1573.57,2877 v1(1852,2877) ; CN7.2 1659,4456 2729,4456 T2.1 3094,4091 3231,4091 T3.2
  Bottom Layer w40: T3.2 3450,4200 3556,4094 4668.76,4094 F1.1
pads on no net: ENC1.6 ENC1.7 IC1.3 IC1.4 IC1.25 IC1.26 IC1.40 IC3.10 IC3.11 IC3.19 IC3.20 J1B.3 J9B.3 RE1.12 RE1.22
copper on no net: | length 10100
  Bottom Layer w10: 5520,1155 6870,1155 6870,4855 5520,4855 5520,1155

## Polygon pours and split planes (outlines as drawn)
no net on Top Layer "NONET_L01_P001" (solid, pour order 1): 1050,4975 5425,4975 5425,1025 1050,1025
no net on Top Layer "NONET_L01_P004" (solid, pour order 4): 5575,4800 6825,4800 6825,1190 5575,1190
no net on Bottom Layer "NONET_L02_P002" (solid, pour order 2): 1050,4975 5425,4975 5425,1025 1050,1025
no net on Bottom Layer "NONET_L02_P003" (solid, pour order 3): 5575,4800 6825,4800 6825,1190 5575,1190

## Silkscreen, mask and mechanical layers (free items; w line width, h text height)
Top Overlay:
  text "Devlin Maes" at 1220,1465 h60

## Text inside footprints (layer, text, board x,y; h text height)
DP1: Top Overlay "1" at 6400,3410 h60 r270; Top Overlay "12" at 6410,2320 h60 r270; Top Overlay "connector" at 6665,3065 h60 r270